# Altium PCB WalkMod C0.PcbDoc
Units mm, origin at the board's own origin, x right, y up, seen from the top; angles counter-clockwise.
Board outline 18 x 18 mm, 2 copper layers (Top Layer, Bottom Layer), stack 0.67 mm thick; 32 components, 27 nets, 101 pads, 54 vias.
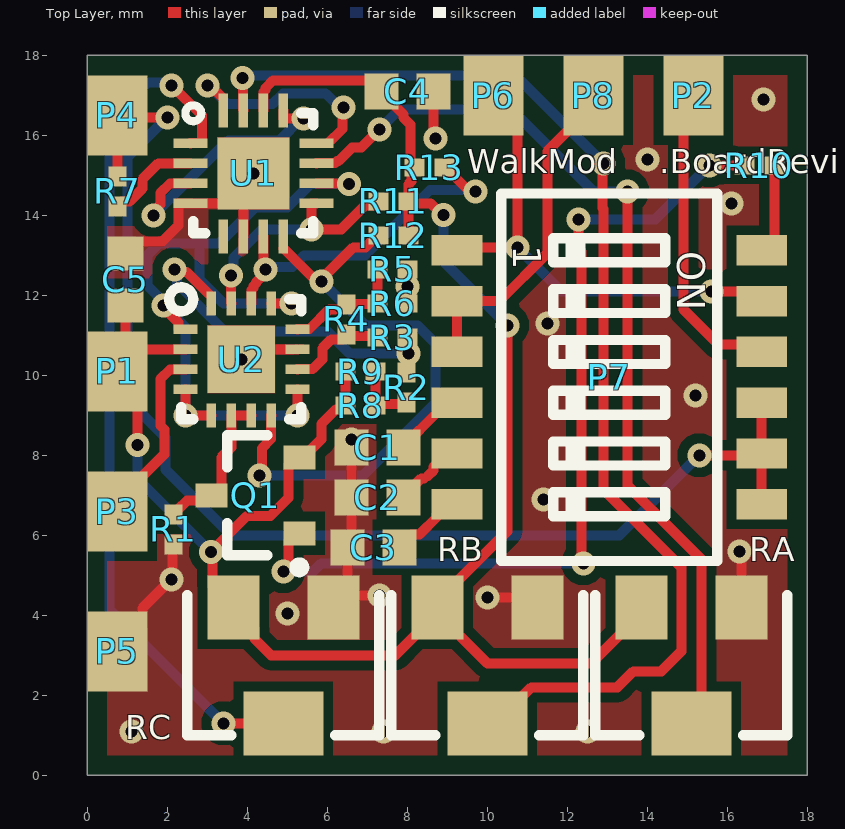
[diagram p0: Top Layer view]
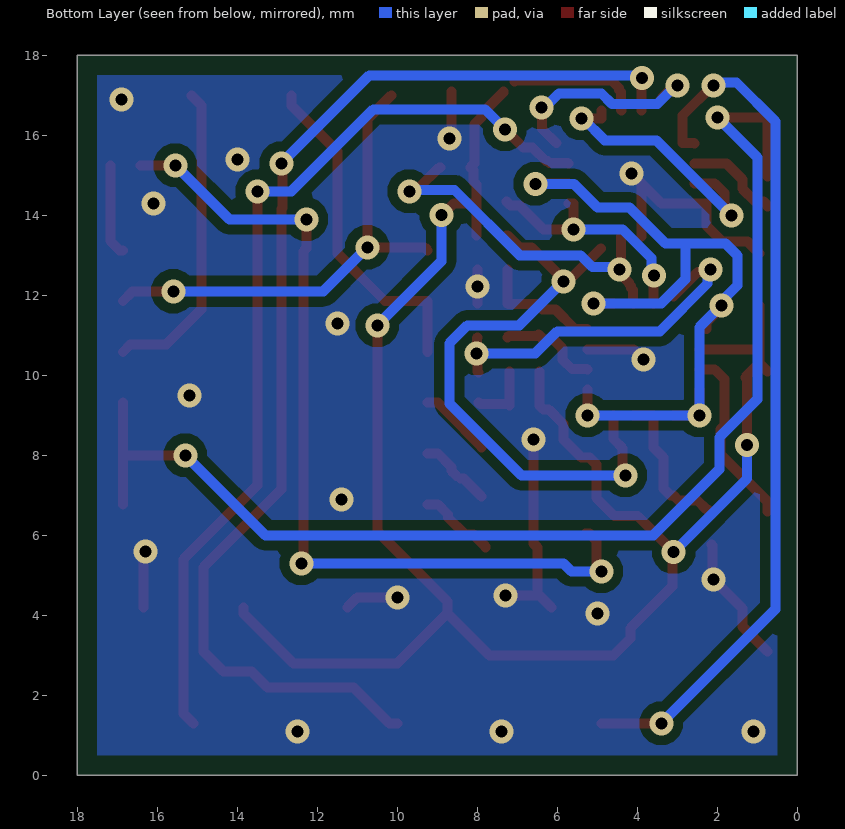
[diagram p1: Bottom Layer view, seen from below]

## Layer stack, top to bottom
Top Solder: solder mask 0.0254, SM-001, Dk 4
Top Layer: signal copper 0.035
Dielectric 1: core 0.6, Core-038, Dk 4.6
Bottom Layer: signal copper 0.035
Bottom Solder: solder mask 0.0254, SM-001, Dk 4

## Board outline
0,0 0,18 18,18 18,0

## Design rules (kind name [scope] priority, off if disabled: settings)
BoardOutlineClearance [All] p1 off: gap=0.7 ignorepadtopadclearanceinfootprint=FALSE
Clearance Polygon_Clearance [InPolygon] p1: gap=0.25 ignorepadtopadclearanceinfootprint=FALSE
Clearance QFN16_Clearance [IsPad and HasFootprint('QFN16_0.5_C') vs IsPad and HasFootprint('QFN16_0.5_C')] p2: gap=0.152 ignorepadtopadclearanceinfootprint=FALSE
Clearance [All] p3: gap=0.2 ignorepadtopadclearanceinfootprint=FALSE
Height [All] p1 off: minheight=0 maxheight=25.4 prefheight=12.7
HoleSize [All] p1: absolutevalues=TRUE maxlimit=0.3 minlimit=0.3 maxpercent=80.000 minpercent=20.000
HoleToHoleClearance [All] p1: gap=0.5 allowstackedmicrovias=TRUE
MinimumSolderMaskSliver [All] p1: minsoldermaskwidth=0.08
PolygonConnect [All] p1: connectstyle=Direct reliefconductorwidth=0.254 reliefentries=4 polygonreliefangle="90 Angle" airgapwidth=0.254
RoomDefinition "WalkMod C0" [InComponentClass('WalkMod C0')] p1 off: confinementstyle=ConfineIn formatcopy=TRUE lockcomponents=FALSE outline 0,0 18,0 18,18 0,18
RoutingVias [All] p1: holewidth=0.3 width=0.6 viastyle="Through Hole" minholewidth=0.3 minwidth=0.6 maxholewidth=0.3 maxwidth=0.6
SilkToSolderMaskClearance [IsPad] p1 off: minsilkscreentomaskgap=0.254 clearancetoexposedcopper=TRUE
SolderMaskExpansion [All] p1: expansion=0.055 istentingtop=FALSE
Width [All] p1: maxlimit=0.7 minlimit=0.25 preferedwidth=0.3
25 further rules are at their usual default settings.

## Components (designator, comment, footprint, x,y, rotation, side; value= is the part's Value field where it differs from the comment)
C1 "CL10B105KA8NFNC" CX7R0603K#1 7.25,8.2 r0 top value=1uF
C2 "CL10B474KO8NFNC" CX7R0603K#2 7.25,6.95 r0 top value=470nF
C3 "CC0603KRX7R6BB224" CX7R0603K#3 7.15,5.7 r0 top value=220nF
C4 "CL10B105KA8NFNC" CX7R0603K#4 8,17.1 r180 top value=1uF
C5 "CL10B105KA8NFNC" CX7R0603K#4 0.95,12.4 r270 top value=1uF
P1 "SMD Pad 1 pin" PAD_2X1.5_SQUARE 0.75,10.1 r90 top
P2 "SMD Pad 1 pin" PAD_2X1.5_SQUARE 15.15,17 r270 top
P3 "SMD Pad 1 pin" PAD_2X1.5_SQUARE 0.75,6.6 r90 top
P4 "SMD Pad 1 pin" PAD_2X1.5_SQUARE 0.75,16.5 r90 top
P5 "SMD Pad 1 pin" PAD_2X1.5_SQUARE 0.75,3.1 r270 top
P6 "SMD Pad 1 pin" PAD_2X1.5_SQUARE 10.15,17 r90 top
P7 "DS05-127-2-06BK-SMT-TR" CUI-DS05-127-2-06BK-SMT_C 13.05,9.95 r270 top
P8 "SMD Pad 1 pin" PAD_2X1.5_SQUARE 12.65,17 r90 top
Q1 "BC857B-TP" BC8xx_SOT23-3_C 4.2,7 r180 top
R1 "RG1005P-472-B-T5" RT0402_C 2.15,6.15 r90 top value=4.7k
R2 "RG1005P-472-B-T5" RT0402_C 7.975,9.7 r270 top value=4.7k
R3 "RG1005P-472-B-T5" RT0402_C 7.625,10.95 r0 top value=4.7k
R4 "RG1005P-472-B-T5" RT0402_C 6.475,11.4 r270 top value=4.7k
R5 "RG1005P-472-B-T5" RT0402_C 7.625,12.65 r180 top value=4.7k
R6 "RG1005P-472-B-T5" RT0402_C 7.625,11.8 r180 top value=4.7k
R7 "RG1005P-472-B-T5" RT0402_C 0.75,14.6 r270 top value=4.7k
R8 "RG1005P-472-B-T5" RT0402_C 6.825,9.25 r180 top value=4.7k
R9 "RG1005P-472-B-T5" RT0402_C 6.825,10.1 r180 top value=4.7k
R10 "RG1005P-472-B-T5" RT0402_C 16.8,15.25 r0 top value=4.7k
R11 "RG1005P-472-B-T5" RT0402_C 7.65,14.35 r180 top value=4.7k
R12 "RG1005P-472-B-T5" RT0402_C 7.65,13.5 r180 top value=4.7k
R13 "RG1005P-472-B-T5" RT0402_C 8.55,15.2 r0 top value=4.7k
RA "3214W-1-103E" BOURNS_3214W_C 15.1,2.75 r90 top value=10k
RB "3214W-1-103E" BOURNS_3214W_C 10,2.75 r90 top value=10k
RC "3214W-1-103E" BOURNS_3214W_C 4.9,2.75 r90 top value=10k
U1 "NX3L4053HR,115" HXQFN16_SOT1039-2_C 4.15,15.05 r0 top
U2 "TLV9004SIRTER" WQFN-16_3X3_0.5_C 3.85,10.4 r0 top

## Footprints (in the part's own frame and the unit in brackets; to place one, negate y for a bottom-side part, rotate by r counter-clockwise, add the part's x,y. Pads: shape width x height; smd on the part's side, far side on the other; paste and mask are expansions set on the pad)
BC8xx_SOT23-3_C [mm] "SOT23, 3-Leads, Body 2.92x2.37mm, Pitch 0.95mm, IPC High Density"
  rect 0.8x0.6 smd: B(-1.1,0.95) C(1.1,0) E(-1.1,-0.95)
  silkscreen extent -1.23,-1.5 0.7,1.92, body extent -0.7,-1.52 0.7,1.52, height 1.1
BOURNS_3214W_C [mm]
  rect 1.6x1.3 smd: 1(1.45,-1.25) 3(1.45,1.25)
  rect 1.6x2 smd: 2(-1.45,0)
  silkscreen extent -1.75,-2.4 1.75,2.4, body extent -1.98,-2.41 1.98,2.42, height 5.29
CUI-DS05-127-2-06BK-SMT_C [mm] "Dip Switch SPST 6 Position Surface Mount Slide (Standard) Actuator 25mA 24VDC"
  rect 0.76x1.27 smd: 1(-3.175,-3.81) 2(-3.175,3.81) 3(-1.905,-3.81) 4(-1.905,3.81) 6(-0.635,3.81) 8(0.635,3.81) 10(1.905,3.81) 12(3.175,3.81)
  rect 0.76x1.27 smd mask+0.102: 5(-0.635,-3.81) 7(0.635,-3.81)
  rect 0.76x1.27 smd mask+0.055: 9(1.905,-3.81) 11(3.175,-3.81)
  silkscreen extent -4.59,-2.7 4.59,2.7, body extent -4.59,-4.15 4.59,4.15, height 2.4
CX7R0603K#1 [mm] "Chip Capacitor, 2-Leads, Body 1.60x0.81mm, IPC High Density"
  rect 0.85x0.9 smd: 1(-0.65,0)
  rect 0.85x0.9 smd mask+0.055: 2(0.65,0)
  body extent -0.88,-0.48 0.87,0.48, height 1.02
CX7R0603K#2 [mm] "Chip Capacitor, 2-Leads, Body 1.60x0.81mm, IPC High Density"
  rect 0.85x0.9 smd: 1(-0.65,0)
  rect 0.85x0.9 smd mask+0: 2(0.65,0)
  body extent -0.88,-0.48 0.87,0.48, height 1.02
CX7R0603K#3 [mm] "Chip Capacitor, 2-Leads, Body 1.60x0.81mm, IPC High Density"
  rect 0.85x0.9 smd: 1(-0.65,0)
  rect 0.85x0.9 smd mask+0.102: 2(0.65,0)
  body extent -0.88,-0.48 0.87,0.48, height 1.02
CX7R0603K#4 [mm] "Chip Capacitor, 2-Leads, Body 1.60x0.81mm, IPC High Density"
  rect 0.85x0.9 smd: 1(-0.65,0) 2(0.65,0)
  body extent -0.88,-0.48 0.87,0.48, height 1.02
HXQFN16_SOT1039-2_C [mm] "HXQFN16 (U) plastic thermal enhanced extremely thin quad  flat package; no leads; 16 terminals, 0.5 mm pitch, 3 mm x 3  mm x 0.5 mm body"
  rect 0.85x0.24 smd paste-0.012: 1(-1.575,0.75) 2(-1.575,0.25) 3(-1.575,-0.25) 4(-1.575,-0.75) 9(1.575,-0.75) 10(1.575,-0.25) 11(1.575,0.25) 12(1.575,0.75)
  rect 0.24x0.85 smd paste-0.012: 5(-0.75,-1.575) 6(-0.25,-1.575) 7(0.25,-1.575) 8(0.75,-1.575) 13(0.75,1.575) 14(0.25,1.575) 15(-0.25,1.575) 16(-0.75,1.575)
  rect 1.8x1.8 smd paste-0.5: EP(0,0)
  silkscreen extent -1.7,-1.5 1.5,1.7, body extent -1.5,-1.5 1.5,1.5, height 0.5
PAD_2X1.5_SQUARE [mm]
  rect 2x1.5 smd paste-5: 1(0,0)
RT0402_C [mm] "Chip Resistor, 2-Leads, Body 1.00x0.50mm, IPC High Density"
  rect 0.5x0.45 smd: 1(-0.375,0) 2(0.375,0)
  body extent -0.53,-0.27 0.53,0.28, height 0.4
WQFN-16_3X3_0.5_C [mm]
  rect 0.6x0.24 smd: 1(-1.4,0.75) 2(-1.4,0.25) 3(-1.4,-0.25) 4(-1.4,-0.75) 9(1.4,-0.75) 10(1.4,-0.25) 11(1.4,0.25) 12(1.4,0.75)
  rect 0.24x0.6 smd: 5(-0.75,-1.4) 6(-0.25,-1.4) 7(0.25,-1.4) 8(0.75,-1.4) 13(0.75,1.4) 14(0.25,1.4) 15(-0.25,1.4) 16(-0.75,1.4)
  rect 1.68x1.68 smd paste-0.065: EP(0,0)
  silkscreen extent -1.8,-1.5 1.5,1.8, body extent -1.5,-1.5 1.5,1.5, height 0.8

## Part data
C1 C4 C5: library part kyocera-C-X7R-0603, "1 µF ±10% 25V Ceramic Capacitor X7R 0603 (1608 Metric)", Value2=25V, Size=0603, Type=CL10B105KA8NFNC
C2: library part kyocera-C-X7R-0603, "0.47 µF ±10% 16V Ceramic Capacitor X7R 0603 (1608 Metric)", Value2=16V, Size=0603, Type=CL10B474KO8NFNC
C3: library part kyocera-C-X7R-0603, "0.22 µF ±10% 10V Ceramic Capacitor X7R 0603 (1608 Metric)", Value2=10V, Size=0603, Type=CC0603KRX7R6BB224
P1 P2 P3 P4 P5 P6 P8: "Single SMD Pad"
  P1: Name=3.3V
  P2: Name="Replacement Button"
  P3: Name="Axis In"
  P4: Name="Axis Out"
  P5: Name=GND
  P6: Name="Button In"
  P8: Name="Button Out"
P7: "Dip Switch SPST 6 Position Surface Mount Slide (Standard) Actuator 25mA 24VDC", Type=DS05-127-2-06BK-SMT-TR
Q1: "Bipolar (BJT) Transistor PNP 45 V 100 mA 200MHz 310 mW Surface Mount SOT-23", Type=BC857B-TP
R1 R2 R3 R4 R5 R6 R7 R8 R9 R10 R11 R12 R13: library part RT0402DRD0747KL, "4.7 kOhms ±0.1% 0.063W, 1/16W Chip Resistor 0402 (1005 Metric) Anti-Sulfur, Automotive AEC-Q200 Thin Film", Value2=62.5mW, Type=RG1005P-472-B-T5
RA RB RC: "10 kOhms 0.25W, 1/4W J Lead Surface Mount Trimmer Potentiometer Cermet 5.0 Turn Top Adjustment", Value2=250mW, Type=3214W-1-103E
U1: library part NX3L4053, "3 Circuit IC Switch 2:1 800mOhm 16-HXQFN (3x3)", Manufacturer Part Number 1="NXP USA Inc.", Manufacturer 1=NX3L4053HR,115, Type=NX3L4053HR,115
U2: Manufacturer 1="Texas Instruments", Manufacturer Part Number 1=TLV9004SIRTER, Type=TLV9004SIRTER

## Via types
v1: diameter 0.6, hole 0.3, Top Layer to Bottom Layer, 54 vias

## Nets (pads, with @x,y where several pads share a name; then routed paths per layer and width w, separated by ;. In a path a pad name is that pad's centre, name@x,y a point inside that pad or via, vN(x,y) a via of type N, cw(c..) or ccw(c..) an arc to the next point about the centre after c; other vN are vias at no path point)
1S: R11.2 U1.9 U2.15 | length 6.1
  Top Layer w0.25: v1(3.587,12.496) 3.595,12.489 3.595,11.805 U2.15 ; U1.9 5.605,14.3 5.6,14.295 v1(5.6,13.65) 6.35,13.65 6.95,14.25 7.175,14.25 R11.2
  Bottom Layer w0.25: v1(3.587,12.496) 3.65,12.559 3.65,12.93 4.37,13.65 v1(5.6,13.65)
2S: R12.2 U1.8 U2.8 | length 15
  Top Layer w0.25: v1(4.3,7.5) 4.365,7.565 4.365,8.175 4.595,8.405 4.595,8.995 U2.8 ; U1.8@4.905,13.175 5.663,12.417 5.783,12.417 v1(5.85,12.35) 5.85,12.4 6.65,13.2 6.95,13.2 7.25,13.5 R12.2
  Bottom Layer w0.25: v1(4.3,7.5) 6.9,7.5 8.7,9.3 8.7,10.8 8.25,11.25 6.95,11.25 v1(5.85,12.35)
3S: R13.2 U1.7 U2.14 | length 8.9
  Top Layer w0.25: U2.14 4.105,11.805 4.105,12.13 4.155,12.18 4.155,12.235 4.212,12.292 4.212,12.318 4.45,12.555 v1(4.45,12.65) 4.405,12.695 4.405,13.47 U1.7 ; R13.2 8.95,15.2 9.483,14.667 9.633,14.667 v1(9.7,14.6)
  Bottom Layer w0.25: v1(4.45,12.65) 4.508,12.708 5.125,12.708 5.417,13 6.941,13 8.571,14.63 9.67,14.63 v1(9.7,14.6)
+3.3V: C4.2 C5.2 P1.1 Q1.E R8.2 R9.2 R11.1 R12.1 R13.1 RA.3 RB.3 RC.3 U1.14 U2.2 | length 49.1
  Top Layer w0.25: P1.1 P1.1@0.95,10.3 ; C5.2 P1.1@0.95,10.65 ; v1(1.258,8.258) 1.258,9.908 1.3,9.95 P1.1@0.95,10.3 ; U2.2 P1.1@0.95,10.65 ; U1.14 4.405,16.63 4.405,17.084 4.455,17.134 4.455,17.185 4.645,17.375 5.65,17.375 7.075,17.375 C4.2@7.075,17.35 ; R9.2 R8.2 6.35,9.15 6.215,9.15 5.85,8.785 5.85,8.4 5.4,7.95 Q1.E 5.2,7.95 5.025,7.775 5.025,6.935 4.575,6.485 3.989,6.485 v1(3.088,5.584) 3.125,5.547 3.125,4.725 4.175,3.675 4.175,3.421 4.596,3 7.7,3 RB.3@8.75,4.05 ; C4.2 7.35,17.075 7.9,16.525 7.9,16.441 8.075,16.266 8.075,15.3 R13.1 8.1,15.125 8.1,14.85 8.025,14.775 R11.1 ; R12.1 R11.1 ; v1(8.9,14.005) 8.874,14.005 8.579,14.3 8.075,14.3 R11.1 ; v1(10.5,11.25) 10.5,6.1 8.75,4.35 RB.3 RB.3@8.75,4.05 ; RA.3 13.85,4.05 12.6,2.8 10,2.8 RB.3@8.75,4.05 ; P1.1@0.95,10.3 P1.1@0.95,10.65
  Bottom Layer w0.25: v1(1.258,8.258) 1.258,7.414 v1(3.088,5.584) ; v1(8.9,14.005) 8.9,12.85 v1(10.5,11.25)
A: RA.2 U1.11 | length 23.4
  Top Layer w0.25: U1.11 5.73,15.305 6.197,15.305 6.247,15.355 6.285,15.355 6.624,15.694 6.851,15.694 v1(7.307,16.15) ; v1(13.5,14.6) 13.5,7.25 15.35,5.4 15.35,1.55 RA.2
  Bottom Layer w0.25: v1(7.307,16.15) 7.807,16.65 10.6,16.65 12.65,14.6 v1(13.5,14.6)
ALT_BTN: P2.1 P7.6 | length 7.9
  Top Layer w0.25: P2.1 14.9,16.75 14.9,11.65 15.775,10.775 16.67,10.775 P7.6
B: RB.2 U1.15 | length 29.4
  Top Layer w0.25: v1(3.883,17.437) 3.895,17.426 3.895,16.63 U1.15 ; RB.2 10.2,1.3 11.1,2.2 13.25,2.2 13.65,2.6 14.35,2.6 14.85,3.1 14.85,5.2 12.9,7.15 12.9,14.159 12.875,14.184 12.875,15.275 v1(12.9,15.3)
  Bottom Layer w0.25: v1(3.883,17.437) 3.946,17.5 10.7,17.5 v1(12.9,15.3)
BTN_IN: P6.1 P7.1 P7.4 | length 12.3
  Top Layer w0.25: P7.1 9.315,13.2 v1(10.75,13.2) 10.75,16.4 P6.1 ; v1(15.6,12.1) 16.615,12.1 P7.4
  Bottom Layer w0.25: v1(10.75,13.2) 11.85,12.1 v1(15.6,12.1)
BTN_OUT: P7.3 P7.5 P8.1 | length 8.5
  Top Layer w0.25: P7.5 P7.3 10.305,11.855 11.5,13.05 11.5,15.6 12.65,16.75 P8.1
C: RC.2 U1.1 | length 21.8
  Top Layer w0.25: v1(2.1,17.25) 2.109,17.25 2.866,16.492 2.866,15.805 2.58,15.805 U1.1 ; v1(3.4,1.3) RC.2
  Bottom Layer w0.25: v1(2.1,17.25) 2.033,17.317 1.517,17.317 0.55,16.35 0.55,4.15 v1(3.4,1.3)
GND: C1.1 C2.1 C3.1 C4.1 C5.1 P5.1 R1.1 R5.1 R6.1 RA.1 RB.1 RC.1 U1.4 U1.6 U1.EP U2.11 U2.EP | length 20.3
  Top Layer w0.25: P5.1 1.375,3.725 1.375,4.175 v1(2.1,4.9) 2.125,4.925 2.125,5.75 R1.1 ; C5.1 1.25,13.35 1.884,13.35 2.275,13.741 2.275,14.295 2.28,14.3 U1.4 3.4,14.3 U1.EP@3.9,14.8 ; v1(3.85,10.4) 4.1,10.65 U2.11 ; U1.6 U1.EP@3.9,14.8 ; v1(4.15,15.05) U1.EP@3.9,14.8 ; RC.1 RC.1@6.5,4.55 ; C1.1 C2.1 6.6,5.8 C3.1 RC.1@6.5,4.55 ; v1(7.3,4.5) 6.55,4.5 RC.1@6.5,4.55 ; R6.1 R5.1 ; C4.1 8.65,16.05 8.7,16 v1(8.7,15.925) ; v1(10,4.45) 11,4.45 RB.1 ; v1(16.3,5.6) 16.3,5.5 16.35,5.45 RA.1
  other v1: 1.1,1.1 7.4,1.1 12.5,1.1 5,4.05 11.4,6.9 6.6,8.4 15.2,9.5 11.5,11.3 8,12.225 16.1,14.3 14,15.4 16.9,16.9
IN: P3.1 U2.3 | length 4.6
  Top Layer w0.25: P3.1 0.75,6.85 1.925,8.025 1.925,8.641 1.825,8.741 1.825,9.565 1.825,9.905 2.065,10.145 2.445,10.145 U2.3
IN_BUF: U1.10 U2.1 U2.4 U2.5 U2.9 U2.13 | length 20.4
  Top Layer w0.25: v1(1.9,11.75) 1.9,11.7 2.275,11.325 U2.1@2.275,11.155 ; U2.4 v1(2.45,9) U2.5 ; U2.13 v1(5.1,11.8) ; v1(5.25,9) U2.9 ; U1.10 v1@6.535,14.8
  Bottom Layer w0.25: v1(2.45,9) 2.45,11.2 v1(1.9,11.75) 1.9,11.845 1.5,12.245 1.5,13 1.8,13.3 2.8,13.3 ; v1@2.475,9.025 2.5,9 v1(5.25,9) ; v1(5.1,11.8) 3.4,11.8 2.8,12.4 2.8,13.3 ; v1(6.547,14.787) 5.587,14.787 5,14.2 4.2,14.2 3.3,13.3 2.8,13.3
NetC1_2: C1.2 P7.7 | length 1.8
  Top Layer w0.25: C1.2 7.9,8.225 8.755,9.08 8.755,9.085 8.985,9.315 P7.7
NetC2_2: C2.2 P7.9 | length 1.7
  Top Layer w0.25: C2.2@7.9,6.975 8.35,7.425 8.415,7.425 ; 8.515,7.48 8.65,7.615 8.65,7.71 8.985,8.045 P7.9
NetC3_2: C3.2 P7.11 | length 1.9
  Top Layer w0.25: C3.2 7.8,5.725 8.1,6.025 8.31,6.025 8.73,6.445 8.73,6.52 8.985,6.775 P7.11
NetP7_2: P7.2 R10.2 | length 2.3
  Top Layer w0.25: P7.2 16.945,13.125 17.175,13.355 R10.2
NetQ1_B: Q1.B R10.1 | length 22.1
  Top Layer w0.25: v1(4.9,5.1) 4.9,5.195 5.025,5.32 5.025,5.875 5.2,6.05 Q1.B ; v1(12.275,13.9) 12.275,13.175 12.35,13.1 12.35,5.35 v1(12.4,5.3) ; v1(15.55,15.25) R10.1
  Bottom Layer w0.25: v1(4.9,5.1) 5.65,5.1 5.85,5.3 v1(12.4,5.3) ; v1(12.275,13.9) 14.2,13.9 v1(15.55,15.25)
NetR2_2: R2.2 R8.1 R9.1 | length 1.7
  Top Layer w0.25: R9.1 R8.1 7.237,9.287 7.938,9.287 R2.2
NetU1_3: U1.3 U1.13 | length 6.9
  Top Layer w0.25: v1(1.65,14) 1.65,14.095 1.825,14.27 1.825,14.555 2.065,14.795 2.57,14.795 U1.3 ; U1.13 4.9,16.425 4.905,16.42 v1(5.4,16.42)
  Bottom Layer w0.25: v1(1.65,14) 2.9,15.25 3.525,15.875 4.814,15.875 5.359,16.42 v1(5.4,16.42)
NetU1_12: U1.12 U1.16 | length 5.4
  Top Layer w0.25: v1(3,17.25) 3.07,17.25 U1.16@3.395,16.925 ; U1.12@6.025,15.805 6.379,16.159 6.379,16.679 v1(6.4,16.7)
  Bottom Layer w0.25: v1(3,17.25) 3.028,17.25 3.491,16.787 4.637,16.787 4.895,17.045 5.96,17.045 6.305,16.7 v1(6.4,16.7)
OUT: R7.2 U1.2 | length 2.4
  Top Layer w0.25: R7.2 0.75,14.25 0.85,14.35 1.06,14.35 1.375,14.665 1.375,14.9 1.775,15.3 U1.2
OUT_FLT: P4.1 P7.8 P7.10 P7.12 R7.1 | length 31.4
  Top Layer w0.25: R7.1 P4.1 0.8,16.45 v1(2,16.45) ; v1(15.3,8) P7.10@16.86,8 ; P7.12 P7.10 P7.8
  Bottom Layer w0.25: v1(2,16.45) 1,15.45 1,9.4 1.95,8.45 1.95,7.65 3.6,6 13.3,6 v1(15.3,8)
S\H\D\N\: Q1.C R1.2 U2.6 U2.7 | length 3.9
  Top Layer w0.25: R1.2 2.15,6.55 2.25,6.65 2.275,6.65 2.497,6.872 2.972,6.872 Q1.C 3.175,7 3.35,7.175 3.35,7.95 3.6,8.2 U2.6 U2.7
VT_A: R2.1 R3.2 U2.16 | length 9
  Top Layer w0.25: v1(2.175,12.65) 2.242,12.583 2.487,12.583 U2.16@3.095,11.975 ; R2.1 8,10.1 8,10.525 v1(8.025,10.55) 8.013,10.563 8.013,10.937 R3.2
  Bottom Layer w0.25: v1(2.175,12.65) 2.242,12.583 2.242,12.292 3.434,11.1 6,11.1 6.55,10.55 v1(8.025,10.55)
VT_B: R3.1 R4.2 U2.10 | length 2.6
  Top Layer w0.25: U2.10 5.255,10.155 5.635,10.155 5.875,10.395 5.875,10.675 6.1,10.9 6.375,10.9 6.375,10.925 R4.2 6.513,10.987 7.213,10.987 R3.1
VT_C: R4.1 R5.2 R6.2 U2.12 | length 3
  Top Layer w0.25: U2.12 5.255,11.155 5.555,11.155 6.05,11.65 R4.1@6.375,11.65 ; R4.1 6.488,11.787 7.237,11.787 R6.2 R5.2
pads on no net: U1.5

## Polygon pours and split planes (outlines as drawn)
GND on Bottom Layer "GND_L02_P000" (solid, remove dead copper, pour order 0): 0.5,17.5 0.5,0.5 17.5,0.5 17.5,17.5
GND on Top Layer "GND_L01_P001" (solid, remove dead copper, pour order 1): 10.1,17.5 10.1,15.3 7.2,15.3 7.2,17.5 0.5,17.5 0.5,0.5 17.5,0.5 17.5,17.5

## Silkscreen, mask and mechanical layers (free items; w line width, h text height)
Top Overlay:
  text "WalkMod" at 9.504,15.054 h0.6
  text ".BoardRevision" at 14.304,15.054 h0.6
Board Shape:
  the board outline again, w0.2
Margin:
  lines w0.2: 0.5,0.5 0.5,17.5 17.5,17.5 17.5,0.5 0.5,0.5
Board:
  drawing of 243 lines, arcs and shapes, not listed
  text "Layer" at 36.097,16.287 h1
  text "Name" at 43.104,16.287 h1
  text "Material" at 65.439,16.287 h1
  text "Thickness" at 75.611,16.287 h1
  text "Constant" at 86.616,16.287 h1
  text "Board Layer Stack" at 96.289,16.287 h1
  text "Top Overlay" at 43.104,14.287 h1
  text "Top Solder" at 43.104,12.287 h1
  text "SM-001" at 65.439,12.287 h1
  text "0.025mm" at 75.611,12.287 h1
  text "4" at 86.616,12.287 h1
  text "Top Surface Finish" at 43.104,10.287 h1
  text "PbSn" at 65.439,10.287 h1
  text "0.020mm" at 75.611,10.287 h1
  text "1" at 36.097,8.287 h1
  text "Top Layer" at 43.104,8.287 h1
  text "CF-004" at 65.439,8.287 h1
  text "0.035mm" at 75.611,8.287 h1
  text "Dielectric 1" at 43.104,6.287 h1
  text "Core-038" at 65.439,6.287 h1
  text "0.600mm" at 75.611,6.287 h1
  text "4.6" at 86.616,6.287 h1
  text "2" at 36.097,4.287 h1
  text "Bottom Layer" at 43.104,4.287 h1
  text "CF-004" at 65.439,4.287 h1
  text "0.035mm" at 75.611,4.287 h1
  text "Bottom Surface Finish" at 43.104,2.287 h1
  text "PbSn" at 65.439,2.287 h1
  text "0.020mm" at 75.611,2.287 h1
  text "Bottom Solder" at 43.104,0.287 h1
  text "SM-001" at 65.439,0.287 h1
  text "0.025mm" at 75.611,0.287 h1
  text "4" at 86.616,0.287 h1
  text "Bottom Overlay" at 43.104,-1.713 h1
  text "Total board thickness:" at 36.097,-3.713 h1
  text "0.761mm" at 75.611,-3.713 h1
Drill Drawing:
  lines w0.254: -2.709,22.5 -1.598,22.5 -1.598,23.611 -2.709,23.611 -2.709,22.5
  lines w0.381: -3.733,21.75 113.97,21.75 ; -3.733,24.25 113.97,24.25 ; 5.728,19.25 5.728,26.75 ; 14.9,19.25 14.9,26.75 ; 32.903,19.25 32.903,26.75 ; 41.614,19.25 41.614,26.75 ; 54.123,19.25 54.123,26.75 ; 79.29,19.25 79.29,26.75 ; 89.401,19.25 89.401,26.75 ; 102.11,19.25 102.11,26.75 ; -3.733,19.25 113.97,19.25 113.97,26.75 -3.733,26.75 -3.733,19.25
  text "Symbol" at -2.233,25 h1.2
  text "Count" at 6.478,25 h1.2
  text "Hole Size" at 15.65,25 h1.2
  text "Plated" at 33.653,25 h1.2
  text "Hole Type" at 42.364,25 h1.2
  text "Drill Layer Pair" at 54.873,25 h1.2
  text "Via/Pad" at 80.04,25 h1.2
  text "Pad Shape" at 90.151,25 h1.2
  text "Template" at 102.86,25 h1.2
  text "54" at 6.478,22.5 h1
  text "0.300mm (11.81mil)" at 15.65,22.5 h1
  text "PTH" at 33.653,22.5 h1
  text "Round" at 42.364,22.5 h1
  text "Top Layer - Bottom Layer" at 54.873,22.5 h1
  text "Via" at 80.04,22.5 h1
  text "Rounded" at 90.151,22.5 h1
  text "v60h30" at 102.86,22.5 h1
  text "54 Total" at 6.478,20 h1
Switches - Enable:
  rectangle: 13.75,9.01 14.25,9.61
  region: 12.35,8.34 11.85,8.34 11.85,7.74 12.35,7.74
  rectangle: 13.75,6.47 14.25,7.07
  lines w0.2: 10.35,5.35 15.75,5.35 15.75,14.55 10.35,14.55 10.35,5.35 ; 11.65,6.47 14.45,6.47 14.45,7.07 11.65,7.07 11.65,6.47 ; 11.65,7.74 14.45,7.74 14.45,8.34 11.65,8.34 11.65,7.74 ; 11.65,9.01 14.45,9.01 14.45,9.61 11.65,9.61 11.65,9.01
Switches - Disable:
  region: 12.35,9.61 11.85,9.61 11.85,9.01 12.35,9.01
  rectangle: 13.75,7.74 14.25,8.34
  region: 12.35,7.07 11.85,7.07 11.85,6.47 12.35,6.47
  lines w0.2: 10.35,5.35 15.75,5.35 15.75,14.55 10.35,14.55 10.35,5.35 ; 11.65,6.47 14.45,6.47 14.45,7.07 11.65,7.07 11.65,6.47 ; 11.65,7.74 14.45,7.74 14.45,8.34 11.65,8.34 11.65,7.74 ; 11.65,9.01 14.45,9.01 14.45,9.61 11.65,9.61 11.65,9.01
Switches - No Filter:
  rectangle: 13.75,12.82 14.25,13.42
  rectangle: 13.75,11.55 14.25,12.15
  rectangle: 13.75,10.28 14.25,10.88
  lines w0.2: 10.35,5.35 15.75,5.35 15.75,14.55 10.35,14.55 10.35,5.35 ; 11.65,10.28 14.45,10.28 14.45,10.88 11.65,10.88 11.65,10.28 ; 11.65,11.55 14.45,11.55 14.45,12.15 11.65,12.15 11.65,11.55 ; 11.65,12.82 14.45,12.82 14.45,13.42 11.65,13.42 11.65,12.82
Switches - Filter 1:
  rectangle: 13.75,12.82 14.25,13.42
  rectangle: 13.75,11.55 14.25,12.15
  region: 12.35,10.88 11.85,10.88 11.85,10.28 12.35,10.28
  lines w0.2: 10.35,5.35 15.75,5.35 15.75,14.55 10.35,14.55 10.35,5.35 ; 11.65,10.28 14.45,10.28 14.45,10.88 11.65,10.88 11.65,10.28 ; 11.65,11.55 14.45,11.55 14.45,12.15 11.65,12.15 11.65,11.55 ; 11.65,12.82 14.45,12.82 14.45,13.42 11.65,13.42 11.65,12.82
Switches - Filter 2:
  rectangle: 13.75,12.82 14.25,13.42
  region: 12.35,12.15 11.85,12.15 11.85,11.55 12.35,11.55
  rectangle: 13.75,10.28 14.25,10.88
  lines w0.2: 10.35,5.35 15.75,5.35 15.75,14.55 10.35,14.55 10.35,5.35 ; 11.65,10.28 14.45,10.28 14.45,10.88 11.65,10.88 11.65,10.28 ; 11.65,11.55 14.45,11.55 14.45,12.15 11.65,12.15 11.65,11.55 ; 11.65,12.82 14.45,12.82 14.45,13.42 11.65,13.42 11.65,12.82
Switches - Filter 3:
  rectangle: 13.75,12.82 14.25,13.42
  region: 12.35,12.15 11.85,12.15 11.85,11.55 12.35,11.55
  region: 12.35,10.88 11.85,10.88 11.85,10.28 12.35,10.28
  lines w0.2: 10.35,5.35 15.75,5.35 15.75,14.55 10.35,14.55 10.35,5.35 ; 11.65,10.28 14.45,10.28 14.45,10.88 11.65,10.88 11.65,10.28 ; 11.65,11.55 14.45,11.55 14.45,12.15 11.65,12.15 11.65,11.55 ; 11.65,12.82 14.45,12.82 14.45,13.42 11.65,13.42 11.65,12.82
Switches - Filter 4:
  region: 12.35,13.42 11.85,13.42 11.85,12.82 12.35,12.82
  rectangle: 13.75,11.55 14.25,12.15
  rectangle: 13.75,10.28 14.25,10.88
  lines w0.2: 10.35,5.35 15.75,5.35 15.75,14.55 10.35,14.55 10.35,5.35 ; 11.65,10.28 14.45,10.28 14.45,10.88 11.65,10.88 11.65,10.28 ; 11.65,11.55 14.45,11.55 14.45,12.15 11.65,12.15 11.65,11.55 ; 11.65,12.82 14.45,12.82 14.45,13.42 11.65,13.42 11.65,12.82
Switches - Filter 5:
  region: 12.35,13.42 11.85,13.42 11.85,12.82 12.35,12.82
  rectangle: 13.75,11.55 14.25,12.15
  region: 12.35,10.88 11.85,10.88 11.85,10.28 12.35,10.28
  lines w0.2: 10.35,5.35 15.75,5.35 15.75,14.55 10.35,14.55 10.35,5.35 ; 11.65,10.28 14.45,10.28 14.45,10.88 11.65,10.88 11.65,10.28 ; 11.65,11.55 14.45,11.55 14.45,12.15 11.65,12.15 11.65,11.55 ; 11.65,12.82 14.45,12.82 14.45,13.42 11.65,13.42 11.65,12.82
Switches - Filter 6:
  region: 12.35,13.42 11.85,13.42 11.85,12.82 12.35,12.82
  region: 12.35,12.15 11.85,12.15 11.85,11.55 12.35,11.55
  rectangle: 13.75,10.28 14.25,10.88
  lines w0.2: 10.35,5.35 15.75,5.35 15.75,14.55 10.35,14.55 10.35,5.35 ; 11.65,10.28 14.45,10.28 14.45,10.88 11.65,10.88 11.65,10.28 ; 11.65,11.55 14.45,11.55 14.45,12.15 11.65,12.15 11.65,11.55 ; 11.65,12.82 14.45,12.82 14.45,13.42 11.65,13.42 11.65,12.82
Switches - Filter 7:
  region: 12.35,13.42 11.85,13.42 11.85,12.82 12.35,12.82
  region: 12.35,12.15 11.85,12.15 11.85,11.55 12.35,11.55
  region: 12.35,10.88 11.85,10.88 11.85,10.28 12.35,10.28
  lines w0.2: 10.35,5.35 15.75,5.35 15.75,14.55 10.35,14.55 10.35,5.35 ; 11.65,10.28 14.45,10.28 14.45,10.88 11.65,10.88 11.65,10.28 ; 11.65,11.55 14.45,11.55 14.45,12.15 11.65,12.15 11.65,11.55 ; 11.65,12.82 14.45,12.82 14.45,13.42 11.65,13.42 11.65,12.82
Potentiometers:
  circle w0.2: c13.7,2 r0.602
  circle w0.2: c8.6,2 r0.602
  circle w0.2: c3.5,2 r0.602
  lines w0.2: 3.5,1.4 3.5,2.6 ; 8.6,1.4 8.6,2.6 ; 13.7,1.4 13.7,2.6 ; 2.5,1 2.5,4.5 7.3,4.5 7.3,1 2.5,1 ; 7.6,1 12.4,1 12.4,4.5 7.6,4.5 7.6,1 ; 12.7,1 17.5,1 17.5,4.5 12.7,4.5 12.7,1
Pads:
  region: 10.9,16 10.9,18 9.4,18 9.4,16
  region: 13.4,16 13.4,18 11.9,18 11.9,16
  region: 15.9,16 15.9,18 14.4,18 14.4,16
  region: 1.5,2.1 1.5,4.1 0,4.1 0,2.1
  region: 1.5,5.6 1.5,7.6 0,7.6 0,5.6
  region: 1.5,9.1 1.5,11.1 0,11.1 0,9.1
  region: 1.5,15.5 1.5,17.5 0,17.5 0,15.5

## Dimensions
18,0 to 18,18 on Dimensions
0,0 to 18,0 on Dimensions

## Text inside footprints (layer, text, board x,y; h text height)
P7: Top Overlay "ON" at 14.754,13.096 h0.7 r270; Top Overlay "1" at 10.654,13.246 h0.7 r270; Top Assembly "ON" at 14.75,13.15 h0.7 r270; Top Assembly "1" at 10.65,13.25 h0.7 r270